# Altium PCB PCB1.PcbDoc
Units mm, origin at the board's own origin, x right, y up, seen from the top; angles counter-clockwise.
Board outline 64.77 x 94.74 mm, 2 copper layers (Top Layer, Bottom Layer); 20 components, 60 nets, 183 pads, 30 vias.
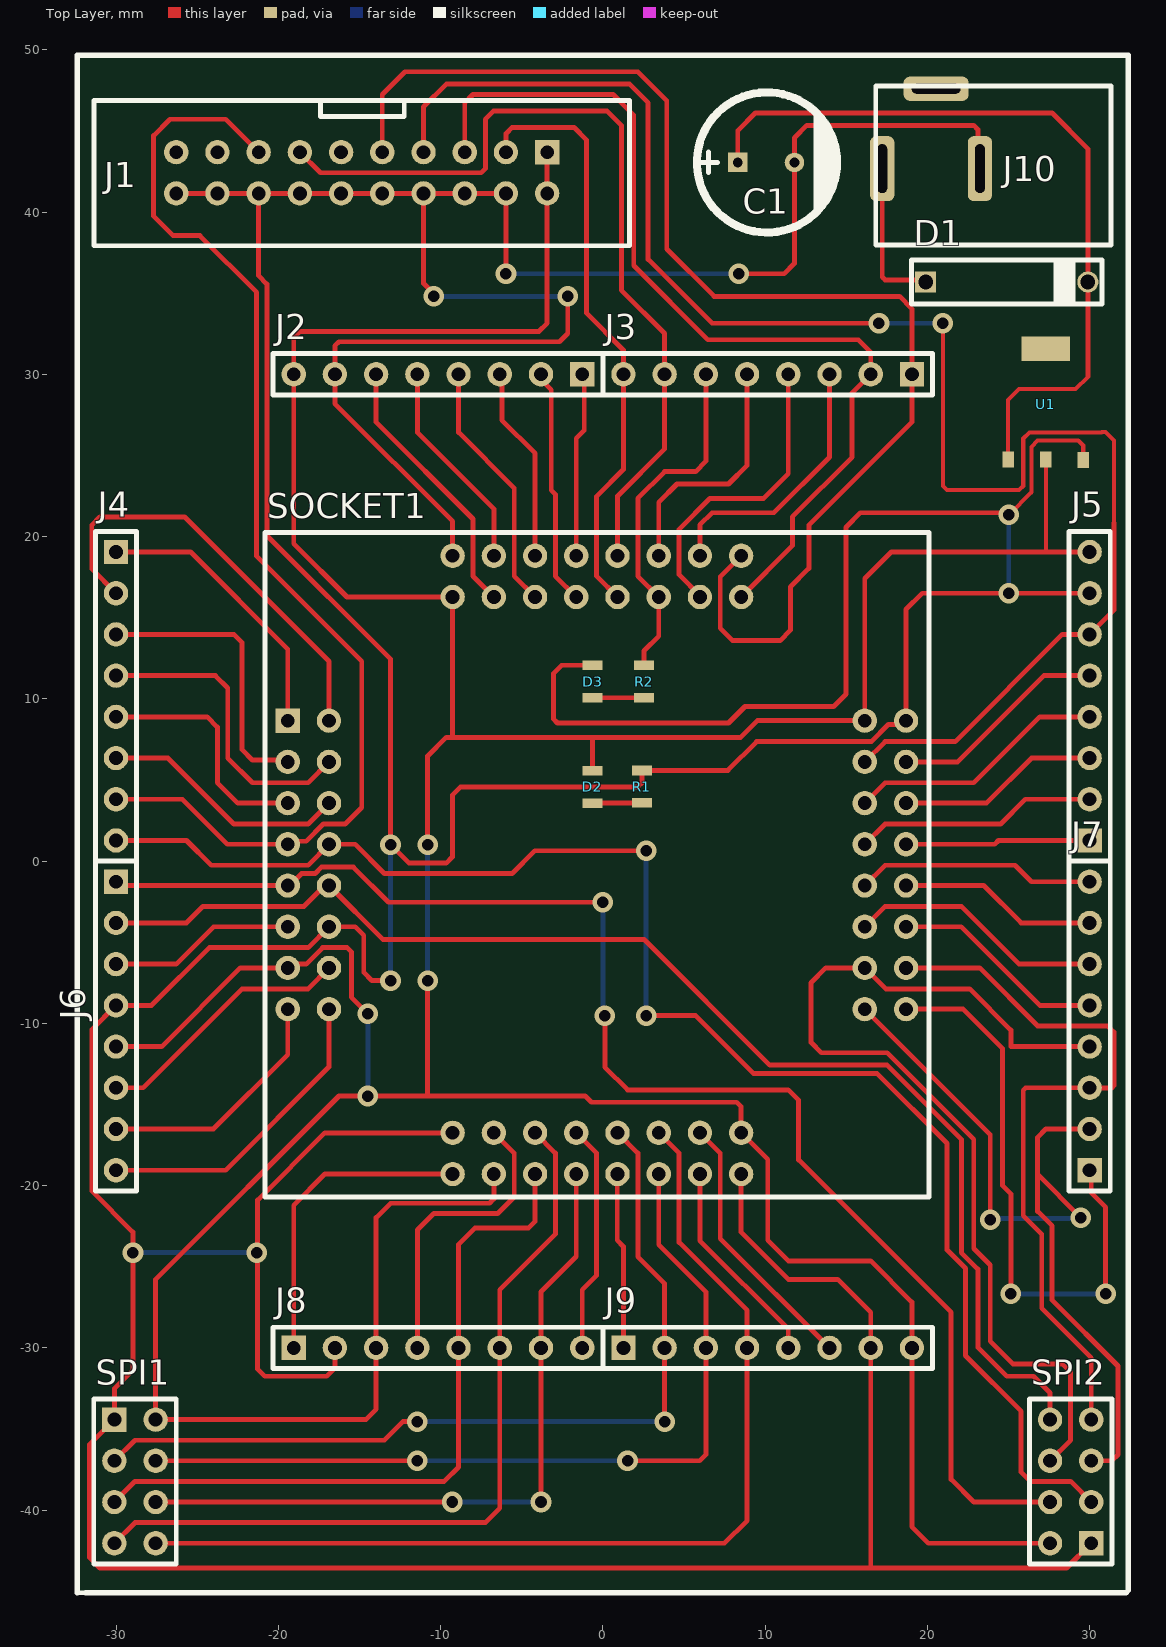
[diagram p0: Top Layer view]
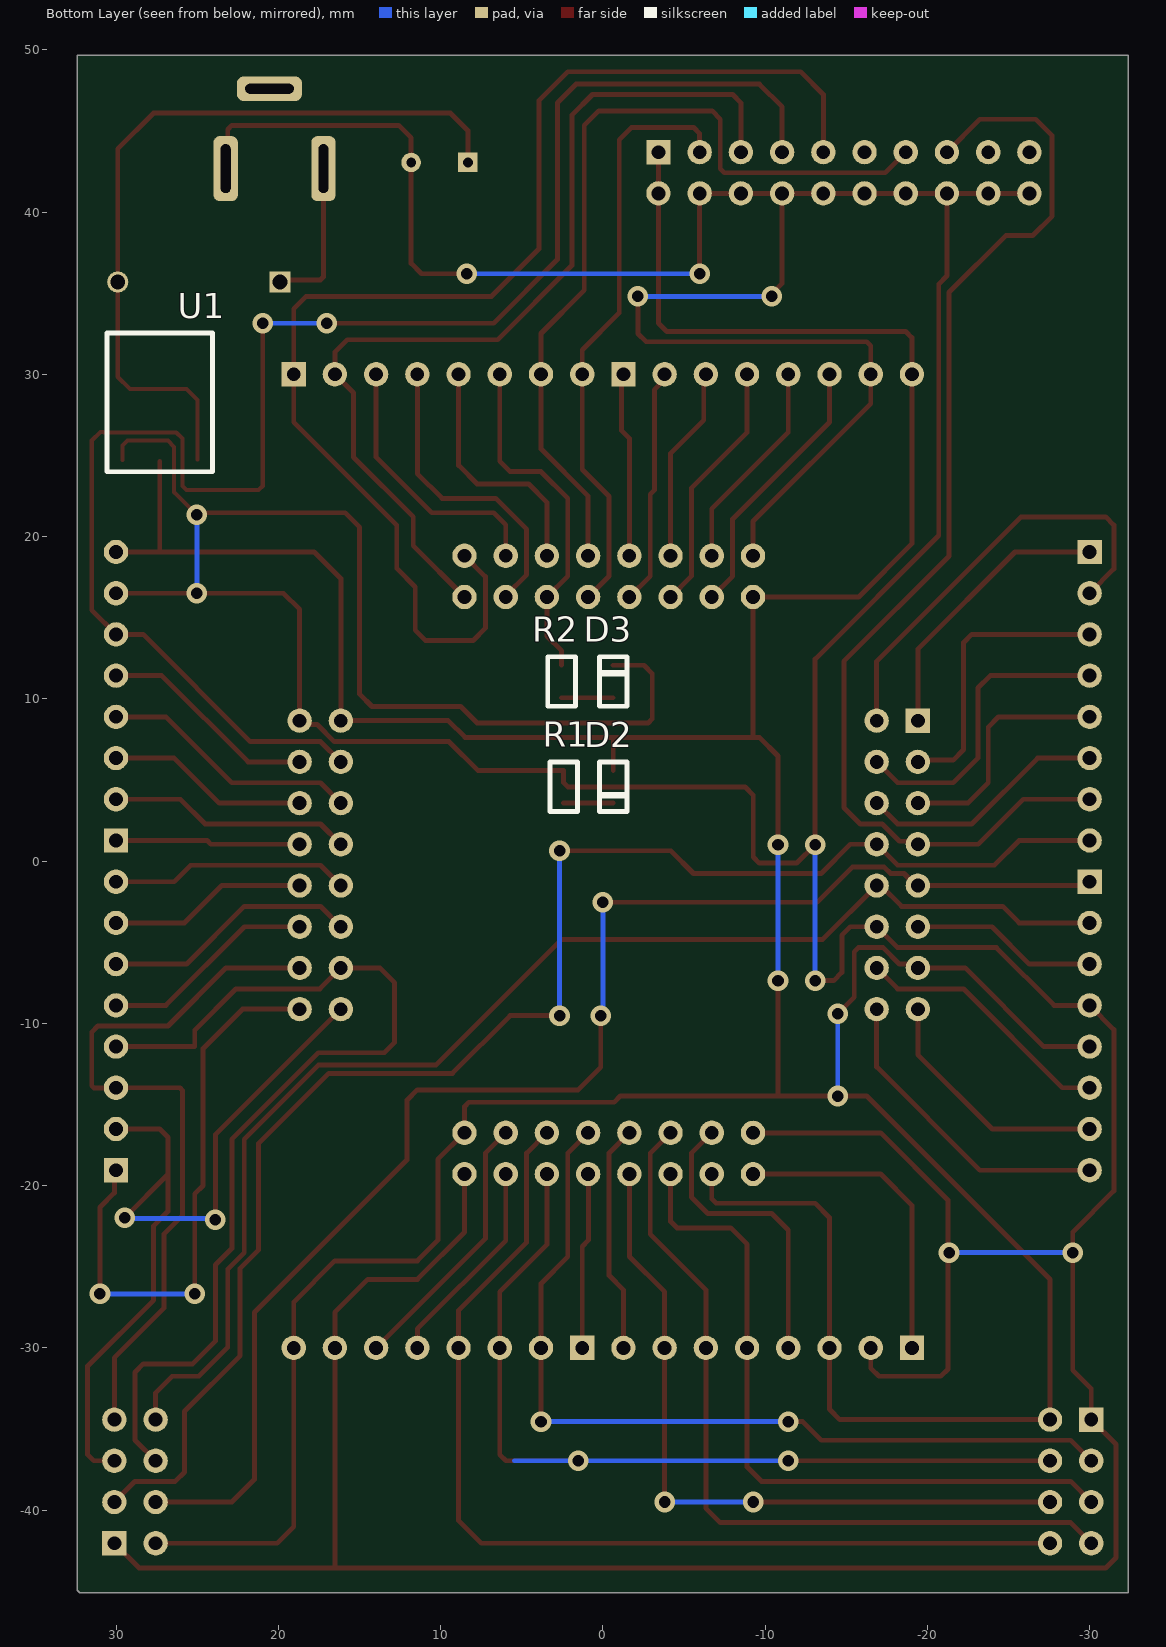
[diagram p1: Bottom Layer view, seen from below]

## Layer stack, top to bottom
Top Solder: solder mask 0.0102, Solder Resist, Dk 3.5
Top Layer: signal copper 0.0356
Dielectric 1: dielectric 0.32, FR-4, Dk 4.8
Bottom Layer: signal copper 0.0356
Bottom Solder: solder mask 0.0102, Solder Resist, Dk 3.5

## Board outline
-32.385,-45.085 32.236,-45.085 32.385,-44.936 32.385,49.657 -32.385,49.657

## Design rules (kind name [scope] priority, off if disabled: settings)
Clearance [All] p1: gap=0.254 ignorepadtopadclearanceinfootprint=FALSE except(0: Arc-Hole Track-Hole SMDPad-Hole THPad-Hole Via-Hole Fill-Hole Poly-Hole Region-Hole Text-Hole)
PolygonConnect [All] p1: connectstyle=Relief reliefconductorwidth=0.254 reliefentries=4 polygonreliefangle="90 Angle" airgapwidth=0.254
RoutingVias [All] p1: holewidth=0.711 width=1.27 viastyle="Through Hole" minholewidth=0.711 minwidth=1.27 maxholewidth=0.711 maxwidth=1.27
SolderMaskExpansion [All] p1: expansion=0.102
Width [All] p1: maxlimit=0.254 minlimit=0.254 preferedwidth=0.254
30 further rules are at their usual default settings.

## Components (designator, comment, footprint, x,y, rotation, side; value= is the part's Value field where it differs from the comment)
C1 "100uF" CAP_RAD_7mm 10.116,43.053 r0 top
D1 "1N4007" DO-41 24.892,35.687 r0 top
D2 "LED0805" L0805RED -0.02,4.572 r270 bottom
D3 "LED0805" L0805RED -1.26,11.065 r90 bottom
J1 "IDC_2.54_10x2" IDC_CONNECTOR_20_2.54 -14.859,42.418 r270 top
J2 "Header 8x1 TH Pitch 2.54mm" "Header 8x1 TH Pitch 2.54mm" -10.16,30 r180 top
J3 "Header 8x1 TH Pitch 2.54mm" "Header 8x1 TH Pitch 2.54mm" 10.16,30 r180 top
J4 "Header 8x1 TH Pitch 2.54mm" "Header 8x1 TH Pitch 2.54mm" -30,10.16 r270 top
J5 "Header 8x1 TH Pitch 2.54mm" "Header 8x1 TH Pitch 2.54mm" 30,10.16 r90 top
J6 "Header 8x1 TH Pitch 2.54mm" "Header 8x1 TH Pitch 2.54mm" -30,-10.16 r270 top
J7 "Header 8x1 TH Pitch 2.54mm" "Header 8x1 TH Pitch 2.54mm" 30,-10.16 r90 top
J8 "Header 8x1 TH Pitch 2.54mm" "Header 8x1 TH Pitch 2.54mm" -10.16,-30 r0 top
J9 "Header 8x1 TH Pitch 2.54mm" "Header 8x1 TH Pitch 2.54mm" 10.16,-30 r0 top
J10 "Connector" DC_K375A_Power 24.516,55.672 r90 top
R1 "10K" R0805 2.413,3.588 r270 bottom
R2 "10k" R0805 2.54,10.065 r270 bottom
SOCKET1 "SOCKET-ADAPTER-OTQ-64-05-03" SOCKET-ADAPTER-OTQ-64-05-03 0,0 r0 top
SPI1 "Header 4x2 TH Pitch 2.54mm" "Header 4x2 TH Pitch 2.54mm" -28.829,-38.227 r0 top
SPI2 "Header 4x2 TH Pitch 2.54mm" "Header 4x2 TH Pitch 2.54mm" 28.829,-38.227 r180 top
U1 "AMS1117" SOT223-3 27.305,28.194 r180 bottom

## Footprints (in the part's own frame and the unit in brackets; to place one, negate y for a bottom-side part, rotate by r counter-clockwise, add the part's x,y. Pads: shape width x height; smd on the part's side, far side on the other; paste and mask are expansions set on the pad)
CAP_RAD_7mm [mm]
  rect 1.2x1.2 hole 0.6: 1(-1.805,0)
  round 1.2 hole 0.6: 2(1.695,0)
  silkscreen extent -4.31,-4.32 4.32,4.32, body extent -4.06,-4 3.94,4, height 11.33
DC_K375A_Power [mm]
  rrect50% 4x1.5 hole 0.6 slot 3 at 0 deg: 1(-13,7.3) 2(-13,1.275)
  rrect50% 1.5x4 hole 0.6 slot 3 at 90 deg: 3(-8.075,3.975)
  silkscreen extent -17.7,-6.8 -7.9,7.7, body extent -17.7,-6.8 -7.9,7.7, height 11
DO-41 [mm]
  rect 1.3x1.3 hole 0.9: 1(-5,0)
  round 1.3 hole 0.9: 2(5,0)
  silkscreen extent -5.87,-1.36 5.87,1.36, body extent -5.43,-1.36 5.43,1.36, height 3.36
"Header 4x2 TH Pitch 2.54mm" [mm]
  rect 1.5x1.5 hole 0.85: 1(-1.27,3.81)
  round 1.5 hole 0.85: 2(1.27,3.81) 3(-1.27,1.27) 4(1.27,1.27) 5(-1.27,-1.27) 6(1.27,-1.27) 7(-1.27,-3.81) 8(1.27,-3.81)
  silkscreen extent -2.54,-5.08 2.54,5.08, body extent -2.54,-5.08 2.54,5.08, height 8.89
"Header 8x1 TH Pitch 2.54mm" [mm]
  rect 1.5x1.5 hole 0.85: 1(-8.89,0)
  round 1.5 hole 0.85: 2(-6.35,0) 3(-3.81,0) 4(-1.27,0) 5(1.27,0) 6(3.81,0) 7(6.35,0) 8(8.89,0)
  silkscreen extent -10.16,-1.27 10.16,1.27, body extent -10.16,-1.27 10.16,1.27, height 8.89
IDC_CONNECTOR_20_2.54 [mm]
  rect 1.5x1.5 hole 0.85: 1(-1.27,11.43)
  round 1.5 hole 0.85: 2(1.27,11.43) 3(-1.27,8.89) 4(1.27,8.89) 5(-1.27,6.35) 6(1.27,6.35) 7(-1.27,3.81) 8(1.27,3.81) 9(-1.27,1.27) 10(1.27,1.27) 11(-1.27,-1.27) 12(1.27,-1.27) 13(-1.27,-3.81) 14(1.27,-3.81) 15(-1.27,-6.35) 16(1.27,-6.35) 17(-1.27,-8.89) 18(1.27,-8.89) 19(-1.27,-11.43) 20(1.27,-11.43)
  silkscreen extent -4.45,-16.5 4.5,16.5, body extent -4.47,-16.6 4.42,16.6, height 9
L0805RED [mm]
  rect 0.6x1.24 smd far side: 1(-1,0.625) 2(1,0.625)
  silkscreen extent -1.53,-0.23 1.52,1.47, body extent -1,0 1,1.25, height 1.1
R0805 [mm]
  rect 0.6x1.24 smd far side: 1(-2,0) 2(0,0)
  silkscreen extent -2.52,-0.85 0.53,0.85, body extent -2,-0.63 0,0.62, height 0.45
SOCKET-ADAPTER-OTQ-64-05-03 [mm]
  rect 1.5x1.5 hole 0.85: 1(-19.415,8.655)
  round 1.5 hole 0.85: 2(-16.875,8.655) 3(-19.415,6.115) 4(-16.875,6.115) 5(-19.415,3.575) 6(-16.875,3.575) 7(-19.415,1.035) 8(-16.875,1.035) 9(-19.415,-1.505) 10(-16.875,-1.505) 11(-19.415,-4.045) 12(-16.875,-4.045) 13(-19.415,-6.585) 14(-16.875,-6.585) 15(-19.415,-9.125) 16(-16.875,-9.125) 17(-9.255,-19.285) 18(-9.255,-16.745) 19(-6.715,-19.285) 20(-6.715,-16.745) 21(-4.175,-19.285) 22(-4.175,-16.745) 23(-1.635,-19.285) 24(-1.635,-16.745) 25(0.905,-19.285) 26(0.905,-16.745) 27(3.445,-19.285) 28(3.445,-16.745) 29(5.985,-19.285) 30(5.985,-16.745) 31(8.525,-19.285) 32(8.525,-16.745) 33(18.685,-9.125) 34(16.145,-9.125) 35(18.685,-6.585) 36(16.145,-6.585) 37(18.685,-4.045) 38(16.145,-4.045) 39(18.685,-1.505) 40(16.145,-1.505) 41(18.685,1.035) 42(16.145,1.035) 43(18.685,3.575) 44(16.145,3.575) 45(18.685,6.115) 46(16.145,6.115) 47(18.685,8.655) 48(16.145,8.655) 49(8.525,18.815) 50(8.525,16.275) 51(5.985,18.815) 52(5.985,16.275) 53(3.445,18.815) 54(3.445,16.275) 55(0.905,18.815) 56(0.905,16.275) 57(-1.635,18.815) 58(-1.635,16.275) 59(-4.175,18.815) 60(-4.175,16.275) 61(-6.715,18.815) 62(-6.715,16.275) 63(-9.255,18.815) 64(-9.255,16.275)
  silkscreen extent -20.82,-20.71 20.11,20.24, body extent -20.69,-20.55 19.95,20.08, height 9.5
SOT223-3 [mm]
  rect 0.7x1 smd far side: 1(-2.3,-3.475) 2(0,-3.45) 3(2.325,-3.45)
  rect 3x1.5 smd far side: 4(0,3.375)
  silkscreen extent -3.25,-4.2 3.25,4.35, body extent -3.25,-3.5 3.25,3.5, height 1.7

## Part data
C1: library part Capacitor(Radian)
J10: library part JackDC
R1 R2: library part "Resistor SMD"
U1: library part AMS1117(SOT-223)

## Via types
v1: diameter 1.27, hole 0.711, Top Layer to Bottom Layer, 30 vias

## Nets (pads, with @x,y where several pads share a name; then routed paths per layer and width w, separated by ;. In a path a pad name is that pad's centre, name@x,y a point inside that pad or via, vN(x,y) a via of type N, cw(c..) or ccw(c..) an arc to the next point about the centre after c; other vN are vias at no path point)
3.3V: D2.1 J1.1 J1.2 J2.8 J5.8 J6.5 J8.3 J9.8 SOCKET1.13 SOCKET1.19 SOCKET1.32 SOCKET1.48 SOCKET1.64 SPI1.2 SPI2.2 U1.2 | length 292
  Top Layer w0.254: 27.305,19.05 U1.2@27.305,24.638
  Top Layer w0.3: J6.5 -27.178,-11.43 -22.333,-6.585 SOCKET1.13 -19.177,-6.346 -18.284,-6.346 -17.272,-5.334 -15.748,-5.334 -15.494,-5.588 -15.494,-8.382 v1(-14.478,-9.398) ; v1(-10.795,-7.366) -10.795,-14.478 ; v1(-10.795,1.016) -10.795,6.477 -9.652,7.62 -9.255,7.62 ; SOCKET1.19 -6.715,-20.812 -6.985,-21.082 -13.081,-21.082 -13.97,-21.971 J8.3 -13.97,-33.782 -14.605,-34.417 SPI1.2 -27.559,-25.781 -16.256,-14.478 v1(-14.478,-14.478) -10.795,-14.478 ; J1.1 J1.2 -3.429,33.147 -3.937,32.639 -18.669,32.639 -19.05,32.258 J2.8 -19.05,19.558 -15.767,16.275 SOCKET1.64 -9.255,7.62 ; D2.1 -0.645,7.62 ; SPI2.2 20.066,-42.037 19.05,-41.021 J9.8 19.05,-27.178 16.51,-24.638 11.43,-24.638 10.16,-23.368 10.16,-18.38 SOCKET1.32 8.525,-15.129 8.255,-14.859 -0.699,-14.859 -1.079,-14.478 -10.795,-14.478 ; J5.8 27.305,19.05 17.78,19.05 16.145,17.415 SOCKET1.48 9.525,8.655 8.49,7.62 -0.645,7.62 ; -9.255,7.62 -0.645,7.62
  Bottom Layer w0.3: v1(-14.478,-14.478) v1(-14.478,-9.398) ; v1(-10.795,-7.366) v1(-10.795,1.016)
GND: C1.2 D3.2 J1.4 J1.6 J1.8 J1.10 J1.12 J1.14 J1.16 J1.18 J1.20 J2.7 J5.7 J6.4 J8.2 J9.7 J10.2 R1.1 SOCKET1.12 SOCKET1.18 SOCKET1.31 SOCKET1.47 SOCKET1.63 SPI1.1 SPI2.1 U1.1 | length 469.4
  Top Layer w0.254: v1(25.019,21.336) 26.416,22.733 26.416,25.527 26.797,25.908 29.297,25.908 29.605,25.6 U1.1
  Top Layer w0.3: J1.20 J1.18 J1.16 ; J8.2 -16.51,-31.242 -17.018,-31.75 -20.828,-31.75 -21.273,-31.305 -21.273,-20.892 -17.126,-16.745 SOCKET1.18 ; v1(-13.081,-7.366) -14.224,-7.366 -14.732,-6.858 -14.732,-4.572 -15.259,-4.045 SOCKET1.12 -18.164,-5.334 -24.257,-5.334 -27.813,-8.89 J6.4 -31.496,-10.386 -31.496,-20.32 -28.956,-22.86 v1(-28.956,-24.13) -28.956,-31.369 -30.099,-32.512 SPI1.1 -31.623,-35.941 -31.623,-42.926 -30.988,-43.561 16.51,-43.561 ; v1(-10.414,34.798) -10.414,34.965 -11.049,35.6 J1.8 ; SOCKET1.63 -9.255,20.939 -16.51,28.194 J2.7 -16.51,31.75 -16.256,32.004 -2.667,32.004 -2.159,32.512 v1(-2.159,34.798) ; v1(-5.969,36.195) J1.4 J1.6 J1.8 ; D3.2 -2.54,12.065 -3.048,11.557 -3.048,8.763 -2.794,8.509 7.747,8.509 8.763,9.525 14.224,9.525 14.986,10.287 14.986,20.574 15.875,21.463 v1@24.892,21.463 ; v1(8.382,36.195) 11.176,36.195 11.811,36.83 C1.2 11.811,44.577 12.573,45.339 22.86,45.339 23.114,45.085 23.114,42.799 J10.2 ; SOCKET1.31 8.525,-22.876 11.43,-25.781 14.478,-25.781 16.51,-27.813 J9.7 16.51,-43.561 ; J5.7 v1(25.019,16.51) 19.685,16.51 18.685,15.51 SOCKET1.47 18.446,8.417 17.601,8.417 16.551,7.366 9.482,7.366 7.704,5.588 R1.1 2.413,4.826 2.159,4.572 -8.763,4.572 -9.271,4.064 -9.271,0.254 -9.652,-0.127 -11.938,-0.127 v1(-13.081,1.016) -13.081,12.446 -20.701,20.066 -20.701,35.56 -21.209,36.068 J1.16 ; SPI2.1 28.575,-43.561 16.51,-43.561 ; J1.16 J1.14 J1.12 J1.10 J1.8
  Bottom Layer w0.3: v1(-28.956,-24.13) v1(-21.336,-24.13) ; v1(-13.081,-7.366) v1(-13.081,1.016) ; v1(-10.414,34.798) v1(-2.159,34.798) ; v1(-5.969,36.195) v1(8.382,36.195) ; v1(25.019,16.51) v1(25.019,21.336)
JTCK: J1.9 J3.1 SOCKET1.49 | length 81
  Top Layer w0.3: J1.9 -13.589,47.244 -12.192,48.641 2.159,48.641 3.937,46.863 3.937,37.719 6.858,34.798 18.288,34.798 19.05,34.036 J3.1 19.05,27.051 12.7,20.701 12.7,18.034 11.557,16.891 11.557,14.224 10.922,13.589 8.001,13.589 7.239,14.351 7.239,17.529 SOCKET1.49
JTDI: J1.5 J3.2 SOCKET1.50 | length 58.7
  Top Layer w0.3: J1.5 -8.509,46.736 -8.001,47.244 0.635,47.244 1.905,45.974 1.905,36.703 6.477,32.131 15.748,32.131 16.51,31.369 J3.2 15.367,28.857 15.367,24.892 11.684,21.209 11.684,19.434 SOCKET1.50
JTDO: J1.13 J3.7 SOCKET1.55 | length 52.9
  Top Layer w0.3: J1.13 -17.399,42.418 -7.493,42.418 -7.239,42.672 -7.239,45.72 -6.731,46.228 0.254,46.228 1.143,45.339 1.143,35.179 3.81,32.512 J3.7 3.81,25.4 0.905,22.495 SOCKET1.55
JTMS: J1.7 J5.6 SOCKET1.46 | length 100.9
  Top Layer w0.254: v1(20.955,33.147) 20.955,23.114 21.209,22.86 25.654,22.86 25.908,23.114 25.908,26.035 26.289,26.416 30.734,26.416 30.756,26.438 30.966,26.438 31.496,25.908 31.496,20.828
  Top Layer w0.3: J1.7 -11.049,46.482 -9.652,47.879 1.651,47.879 2.794,46.736 2.794,37.084 6.731,33.147 v1(17.018,33.147) ; SOCKET1.46 17.396,7.366 21.717,7.366 28.321,13.97 J5.6 31.496,15.466 31.496,20.828
  Bottom Layer w0.3: v1(17.018,33.147) v1(20.955,33.147)
NetC1_1: C1.1 D1.2 U1.3 | length 48.1
  Top Layer w0.254: U1.3 24.98,28.409 25.654,29.083 29.13,29.083 29.892,29.845
  Top Layer w0.3: C1.1 8.311,45.014 9.398,46.101 27.686,46.101 29.892,43.895 D1.2 29.892,29.845
NetD1_1: D1.1 J10.1 | length 9.5
  Top Layer w0.3: J10.1 17.216,35.997 17.399,35.814 19.765,35.814 D1.1
NetD2_2: D2.2 R1.2 | length 3.1
  Top Layer w0.3: D2.2 -0.637,3.58 2.405,3.58 R1.2
NetD3_1: D3.1 R2.2 | length 3.2
  Top Layer w0.3: D3.1 R2.2
NetJ2_1: J2.1 SOCKET1.57 | length 11.4
  Top Layer w0.3: SOCKET1.57 -1.635,26.051 -1.143,26.543 -1.143,29.873 J2.1
NetJ2_2: J2.2 SOCKET1.58 | length 14.6
  Top Layer w0.3: J2.2 -3.81,29.671 -3.175,29.036 -3.175,22.86 -2.921,22.606 -2.921,17.561 SOCKET1.58
NetJ2_3: J2.3 SOCKET1.59 | length 12.1
  Top Layer w0.3: J2.3 -6.223,29.873 -6.223,27.178 -4.175,25.13 SOCKET1.59
NetJ2_4: J2.4 SOCKET1.60 | length 15.7
  Top Layer w0.3: J2.4 -8.89,26.416 -5.461,22.987 -5.461,17.561 SOCKET1.60
NetJ2_5: J2.5 SOCKET1.61 | length 13.1
  Top Layer w0.3: J2.5 -11.43,26.416 -6.715,21.701 SOCKET1.61
NetJ2_6: J2.6 SOCKET1.62 | length 16.7
  Top Layer w0.3: J2.6 -13.97,27.051 -8.001,21.082 -8.001,17.561 SOCKET1.62
NetJ3_3: J3.3 SOCKET1.51 | length 16.7
  Top Layer w0.3: SOCKET1.51 5.985,20.717 6.731,21.463 10.541,21.463 13.97,24.892 J3.3
NetJ3_4: J3.4 SOCKET1.52 | length 19
  Top Layer w0.3: SOCKET1.52 5.985,16.367 4.699,17.653 4.699,20.447 6.604,22.352 9.906,22.352 11.43,23.876 J3.4
NetJ3_5: J3.5 SOCKET1.53 | length 15.3
  Top Layer w0.3: SOCKET1.53 3.445,22.114 4.572,23.241 7.747,23.241 8.89,24.384 J3.5
NetJ3_6: J3.6 R2.1 SOCKET1.54 | length 21.7
  Top Layer w0.3: R2.1 2.54,12.954 3.445,13.859 SOCKET1.54 2.159,17.561 2.159,22.352 3.81,24.003 5.715,24.003 6.35,24.638 J3.6
NetJ4_1: J4.1 SOCKET1.1 | length 17.5
  Top Layer w0.3: J4.1 -25.4,19.05 -19.415,13.065 SOCKET1.1
NetJ4_2: J4.2 SOCKET1.2 | length 27
  Top Layer w0.3: J4.2 -31.496,18.006 -31.496,20.701 -30.988,21.209 -25.781,21.209 -16.875,12.303 SOCKET1.2
NetJ4_3: J4.3 SOCKET1.3 | length 17.7
  Top Layer w0.3: J4.3 -22.733,13.97 -22.225,13.462 -22.225,6.858 -21.59,6.223 -19.523,6.223 SOCKET1.3
NetJ4_4: J4.4 SOCKET1.4 | length 18.9
  Top Layer w0.3: J4.4 -23.876,11.43 -23.114,10.668 -23.114,6.35 -21.59,4.826 -18.164,4.826 SOCKET1.4
NetJ4_5: J4.5 SOCKET1.5 | length 14.8
  Top Layer w0.3: J4.5 -24.384,8.89 -23.749,8.255 -23.749,4.826 -22.498,3.575 SOCKET1.5
NetJ4_6: J4.6 SOCKET1.6 | length 15.3
  Top Layer w0.3: J4.6 -26.797,6.35 -22.733,2.286 -18.164,2.286 SOCKET1.6
NetJ5_1: J5.1 SOCKET1.41 | length 11.4
  Top Layer w0.3: SOCKET1.41 24.149,1.035 24.384,1.27 J5.1
NetJ5_2: J5.2 SOCKET1.42 | length 15
  Top Layer w0.3: SOCKET1.42 17.396,2.286 24.511,2.286 26.035,3.81 J5.2
NetJ5_3: J5.3 SOCKET1.43 | length 12.5
  Top Layer w0.3: SOCKET1.43 23.641,3.575 26.416,6.35 J5.3
NetJ5_4: J5.4 SOCKET1.44 | length 16.1
  Top Layer w0.3: SOCKET1.44 17.396,4.826 22.86,4.826 26.924,8.89 J5.4
NetJ5_5: J5.5 SOCKET1.45 | length 13.5
  Top Layer w0.3: SOCKET1.45 21.863,6.115 27.178,11.43 J5.5
NetJ6_3: J6.3 SOCKET1.11 | length 11.5
  Top Layer w0.3: J6.3 -26.289,-6.35 -23.984,-4.045 SOCKET1.11
NetJ6_6: J6.6 SOCKET1.14 | length 16.2
  Top Layer w0.3: J6.6 -28.321,-13.97 -22.225,-7.874 -18.164,-7.874 SOCKET1.14
NetJ6_7: J6.7 SOCKET1.15 | length 15.3
  Top Layer w0.3: J6.7 -24.003,-16.51 -19.415,-11.922 SOCKET1.15
NetJ6_8: J6.8 SOCKET1.16 | length 19.3
  Top Layer w0.3: J6.8 -23.241,-19.05 -16.875,-12.684 SOCKET1.16
NetJ7_1: J7.1 SOCKET1.33 | length 36.2
  Top Layer w0.3: SOCKET1.33 22.206,-9.125 24.638,-11.557 24.638,-20.003 25.146,-20.511 v1(25.146,-26.67) ; J7.1 30.099,-19.149 30.099,-20.447 30.988,-21.336 v1(30.988,-26.67)
  Bottom Layer w0.3: v1(25.146,-26.67) v1(30.988,-26.67)
NetJ7_5: J7.5 SOCKET1.37 | length 13.3
  Top Layer w0.3: SOCKET1.37 22.079,-4.045 26.924,-8.89 J7.5
NetJ7_6: J7.6 SOCKET1.38 | length 15.8
  Top Layer w0.3: SOCKET1.38 17.396,-2.794 22.098,-2.794 25.654,-6.35 J7.6
NetJ7_7: J7.7 SOCKET1.39 | length 12.3
  Top Layer w0.3: SOCKET1.39 23.476,-1.505 25.781,-3.81 J7.7
NetJ7_8: J7.8 SOCKET1.40 | length 14.8
  Top Layer w0.3: SOCKET1.40 17.396,-0.254 25.4,-0.254 26.416,-1.27 J7.8
NetJ8_1: J8.1 SOCKET1.17 | length 19.4
  Top Layer w0.3: J8.1 -19.05,-21.209 -17.126,-19.285 SOCKET1.17
NetJ8_4: J8.4 SOCKET1.20 | length 18.6
  Top Layer w0.3: J8.4 -11.43,-22.733 -10.414,-21.717 -6.477,-21.717 -5.461,-20.701 -5.461,-17.999 SOCKET1.20
NetJ8_8: J8.8 SOCKET1.24 | length 14.1
  Top Layer w0.3: SOCKET1.24 -0.381,-17.999 -0.381,-25.527 -1.27,-26.416 J8.8
NetJ9_1: J9.1 SOCKET1.25 | length 10.9
  Top Layer w0.3: SOCKET1.25 0.889,-19.301 0.889,-23.368 1.27,-23.749 J9.1
NetJ9_5: J9.5 SOCKET1.29 | length 13
  Top Layer w0.3: SOCKET1.29 5.985,-23.384 11.43,-28.829 J9.5
NetJ9_6: J9.6 SOCKET1.30 | length 16.6
  Top Layer w0.3: SOCKET1.30 7.239,-17.999 7.239,-23.269 J9.6
NJTRST: J1.3 J3.8 SOCKET1.56 | length 36.9
  Top Layer w0.3: J1.3 -5.969,44.831 -5.588,45.212 -1.778,45.212 -1.016,44.45 -1.016,33.782 1.27,31.496 J3.8 1.27,24.13 -0.381,22.479 -0.381,17.561 SOCKET1.56
PB0: J9.2 SOCKET1.26 SPI1.3 | length 53.9
  Top Layer w0.3: SPI1.3 -28.829,-35.687 -13.462,-35.687 -12.319,-34.544 v1(-11.43,-34.544) ; SOCKET1.26 2.159,-17.999 2.159,-24.384 3.81,-26.035 J9.2 v1(3.81,-34.544)
  Bottom Layer w0.3: v1(-11.43,-34.544) v1(3.81,-34.544)
PB1: J9.3 SOCKET1.27 SPI1.4 | length 56.5
  Top Layer w0.3: SPI1.4 v1(-11.43,-36.957) ; v1(1.524,-36.957) 5.969,-36.957 6.35,-36.576 J9.3 6.35,-26.543 3.445,-23.638 SOCKET1.27
  Bottom Layer w0.3: v1(-11.43,-36.957) v1(1.524,-36.957) 5.461,-36.957
PB2: J9.4 SOCKET1.28 SPI1.8 | length 63.2
  Top Layer w0.3: SPI1.8 7.493,-42.037 8.89,-40.64 J9.4 8.89,-27.686 4.699,-23.495 4.699,-17.999 SOCKET1.28
PC0: J4.8 SOCKET1.8 SPI2.3 | length 94.3
  Top Layer w0.3: J4.8 -25.654,1.27 -24.13,-0.254 -18.164,-0.254 SOCKET1.8 -15.259,1.035 -13.462,-0.762 -5.588,-0.762 -4.191,0.635 v1(2.667,0.635) ; v1(2.667,-9.525) 5.715,-9.525 9.271,-13.081 16.891,-13.081 21.209,-17.399 21.209,-23.959 22.352,-25.102 22.352,-30.48 25.781,-33.909 25.781,-37.655 26.352,-38.227 28.829,-38.227 SPI2.3
  Bottom Layer w0.3: v1(2.667,-9.525) v1(2.667,0.635)
PC1: J6.1 SOCKET1.9 SPI2.4 | length 88.4
  Top Layer w0.3: J6.1 -29.765,-1.505 SOCKET1.9 -19.301,-1.505 -18.558,-0.762 -17.732,-0.762 -17.343,-0.374 -15.374,-0.374 -13.208,-2.54 v1(0,-2.54) ; v1(0.127,-9.525) 0.127,-12.7 1.524,-14.097 11.43,-14.097 12.065,-14.732 12.065,-18.415 21.463,-27.813 21.463,-38.1 22.86,-39.497 SPI2.4
  Bottom Layer w0.3: v1(0,-2.54) 0,-9.398 v1(0.127,-9.525)
PC2: J6.2 SOCKET1.10 SPI2.8 | length 80
  Top Layer w0.3: J6.2 -25.654,-3.81 -24.638,-2.794 -18.415,-2.794 -17.126,-1.505 SOCKET1.10 -13.554,-4.826 2.54,-4.826 10.287,-12.573 17.526,-12.573 22.098,-17.145 22.098,-24.13 23.114,-25.146 23.114,-29.972 24.892,-31.75 26.543,-31.75 27.559,-32.766 SPI2.8
RESET: J1.15 J4.7 SOCKET1.7 | length 72.7
  Top Layer w0.3: J4.7 -25.908,3.81 -23.133,1.035 SOCKET1.7 -19.225,1.226 -18.284,1.226 -17.224,2.286 -15.875,2.286 -14.859,3.302 -14.859,5.591 -14.859,12.319 -21.336,18.796 -21.336,35.052 -24.828,38.544 -26.479,38.544 -27.686,39.751 -27.686,44.704 -26.67,45.72 -23.241,45.72 J1.15
SPI1-MISO: J8.6 SOCKET1.22 SPI1.7 | length 49.7
  Top Layer w0.3: SPI1.7 -28.829,-40.767 -7.239,-40.767 -6.35,-39.878 J8.6 -6.35,-26.416 -2.921,-22.987 -2.921,-17.999 SOCKET1.22
SPI1-MOSI: J8.7 SOCKET1.23 SPI1.6 | length 44.9
  Top Layer w0.3: SPI1.6 v1(-9.271,-39.497) ; v1(-3.81,-39.497) J8.7 -3.81,-26.543 -1.635,-24.368 SOCKET1.23
  Bottom Layer w0.3: v1(-9.271,-39.497) v1(-3.81,-39.497)
SPI1-SCK: J8.5 SOCKET1.21 SPI1.5 | length 44
  Top Layer w0.3: SPI1.5 -28.829,-38.227 -9.779,-38.227 -8.89,-37.338 J8.5 -8.89,-23.622 -7.874,-22.606 -4.572,-22.606 -4.169,-22.203 -4.169,-21.993 -4.175,-21.987 SOCKET1.21
SPI2-MISO: J7.3 SOCKET1.35 SPI2.7 | length 45.5
  Top Layer w0.3: SOCKET1.35 23.222,-6.585 26.797,-10.16 31.115,-10.16 31.496,-10.541 31.496,-13.843 31.347,-13.992 30.022,-13.992 J7.3 26.057,-13.97 25.908,-14.119 25.908,-21.844 27.051,-22.987 27.051,-27.559 30.099,-30.607 SPI2.7
SPI2-MOSI: J7.4 SOCKET1.36 SPI2.6 | length 60.9
  Top Layer w0.3: SPI2.6 28.829,-35.687 28.829,-31.496 28.321,-30.988 25.273,-30.988 23.876,-29.591 23.876,-24.892 22.86,-23.876 22.86,-17.145 17.526,-11.811 13.462,-11.811 12.827,-11.176 12.827,-7.493 13.735,-6.585 SOCKET1.36 17.434,-7.874 22.606,-7.874 25.146,-10.414 25.146,-11.43 J7.4
SPI2-SCK: J7.2 SOCKET1.34 SPI2.5 | length 52.4
  Top Layer w0.3: SOCKET1.34 23.876,-16.856 v1(23.876,-22.098) ; v1(29.464,-21.971) 26.797,-19.304 ; J7.2 27.305,-16.51 26.797,-17.018 26.797,-19.304 ; SPI2.5 31.369,-36.957 31.75,-36.576 31.75,-31.115 27.686,-27.051 27.686,-22.479 26.797,-21.59 26.797,-19.304
  Bottom Layer w0.3: v1(23.876,-22.098) 23.939,-22.034 29.4,-22.034 v1(29.464,-21.971)
pads on no net: J1.11 J1.17 J1.19 J10.3 U1.4

## Silkscreen, mask and mechanical layers (free items; w line width, h text height)
Top Overlay:
  lines w0.3: -32.385,-45.085 -31.877,-45.085 ; 32.236,-45.085 32.385,-44.936
  lines w0.35: -32.385,-45.085 -32.385,49.657 32.385,49.657 32.385,-42.291 32.385,-44.936 ; -31.877,-45.085 32.236,-45.085